# EAGLE board v1.1 (EAGLE 6.4)
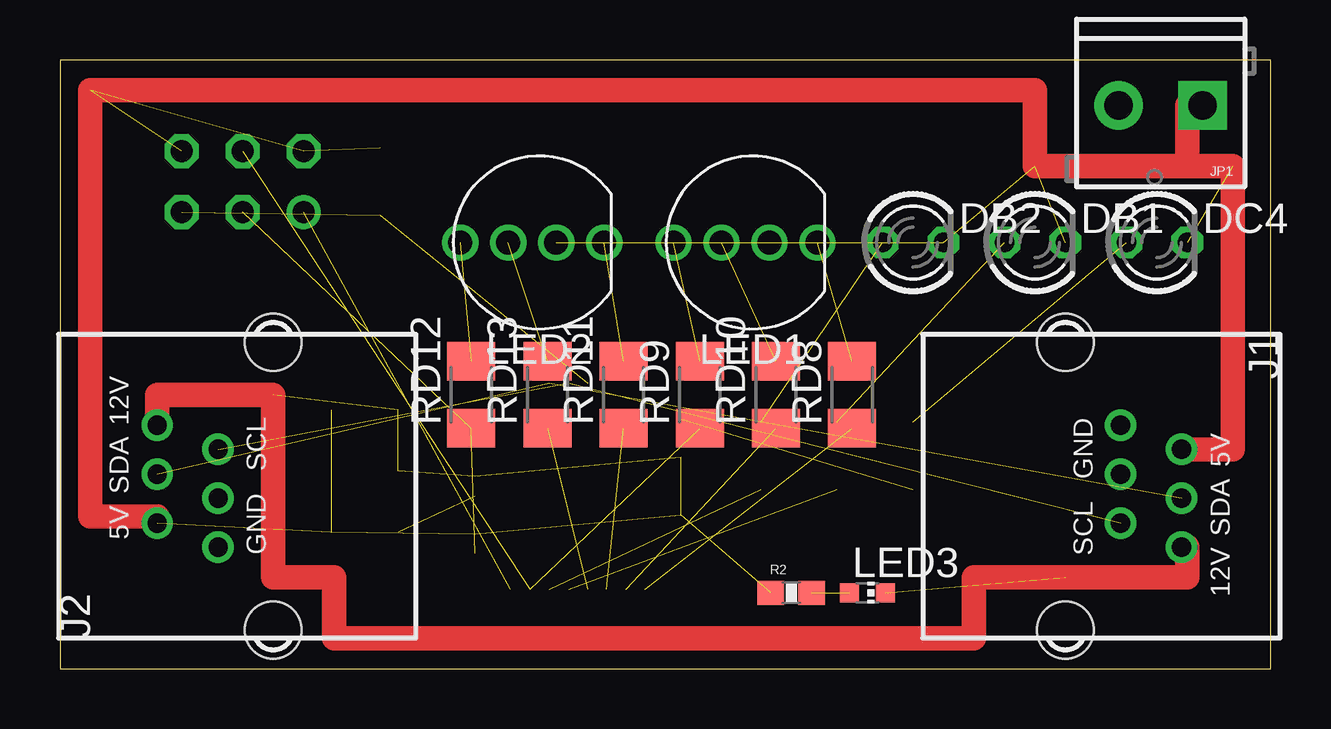
[diagram p0: board, top side]
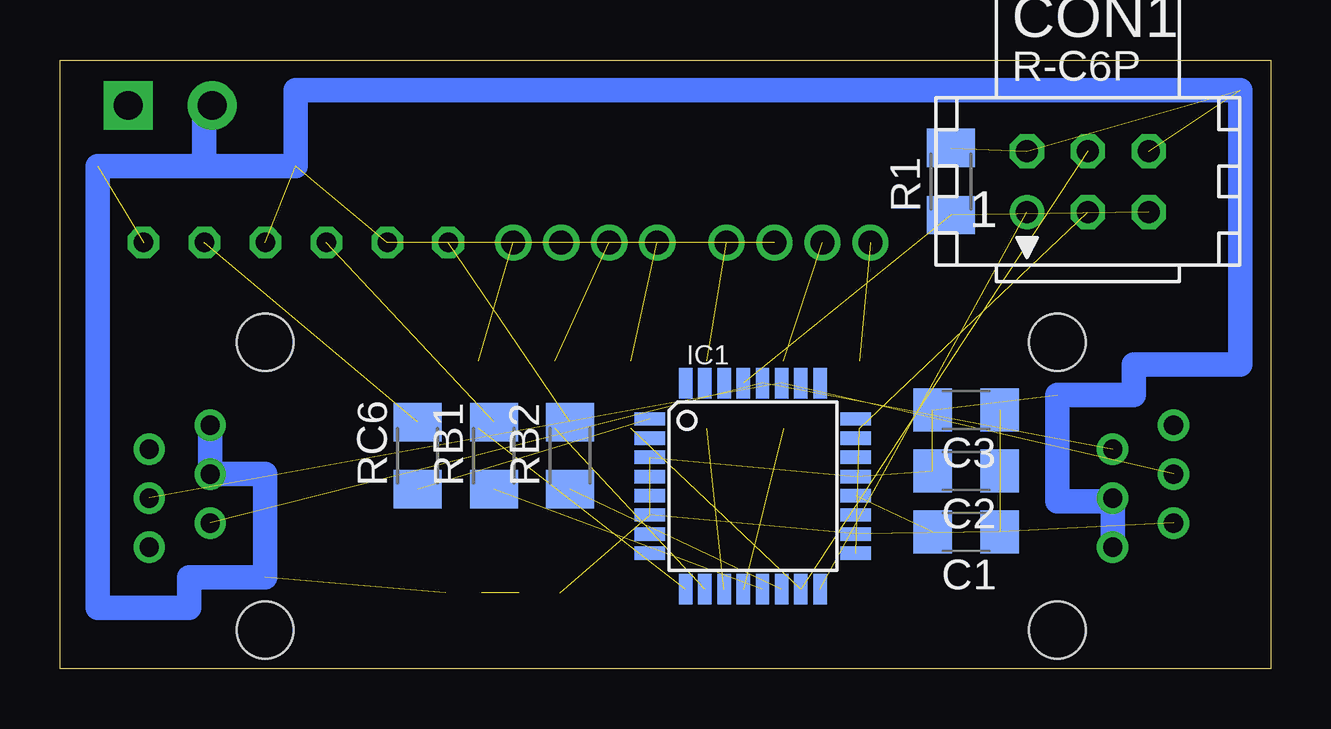
[diagram p1: board, bottom side, seen from below]

Size 50.47 x 25.39 mm. Coordinates in mm from the lower left corner, seen from the top.
Outline: 0,0 50.47,0 50.47,25.39 0,25.39 0,0
Copper layers (1*16): Top 0.035mm / dielectric 1.5mm / Bottom 0.035mm
Design rules "default": minimum track width 10mil, minimum drill 24mil, track to track 8mil, track to pad 8mil, pad to pad 8mil, via to via 8mil, smd to smd 8mil, copper to edge 8mil, drill to drill 8mil, minimum pad ring 10mil, minimum via ring 8mil, stop-mask expansion 4mil, vias tented up to drill 0mil, thermal gap 10mil
Net classes: 1 power: width 0.406 mm
vRestrict: area 15.2,1.3 to 19.1,14; area 24.1,1.3 to 27.9,14; area 15.2,1.3 to 27.9,5.1; area 15.2,10.2 to 27.9,14

## Footprints (pad centres in the part's own frame; a part is rotated, then mirrored left to right if it is on the bottom)
C1206 = smd 1.6 x 1.8: 1 -1.4,0; 2 1.4,0
TINYISP = drill 0.914 octagon: GND 2.54,1.27; MOSI 0,1.27; RESET 2.54,-1.27; SCK 0,-1.27; VCC -2.54,1.27 | drill 0.914: MISO -2.54,-1.27
LED3MM = drill 0.813 octagon: A -1.27,0; K 1.27,0
TQFP32-08 = smd 1.27 x 0.559: 1 -4.293,2.8; 2 -4.293,2; 3 -4.293,1.2; 4 -4.293,0.4; 5 -4.293,-0.4; 6 -4.293,-1.2; 7 -4.293,-2; 8 -4.293,-2.8; 17 4.293,-2.8; 18 4.293,-2; 19 4.293,-1.2; 20 4.293,-0.4; 21 4.293,0.4; 22 4.293,1.2; 23 4.293,2; 24 4.293,2.8 | smd 0.559 x 1.27: 9 -2.8,-4.293; 10 -2,-4.293; 11 -1.2,-4.293; 12 -0.4,-4.293; 13 0.4,-4.293; 14 1.2,-4.293; 15 2,-4.293; 16 2.8,-4.293; 25 2.8,4.293; 26 2,4.293; 27 1.2,4.293; 28 0.4,4.293; 29 -0.4,4.293; 30 -1.2,4.293; 31 -2,4.293; 32 -2.8,4.293
RJ12-RIGHTANGLE-I2C = drill 0.8 pad 1.3: +5V -1.54,4.84; +12V 2.54,4.84; GND1 -2.54,2.3; GND2 -0.5,2.3; SCL 1.54,2.3; SDA 0.5,4.84 | hole 2.36: -6,0; 6,0
SCREWTERMINAL-3.5MM-2 = drill 1.2 pad 2.032 square: 1 0,0 | drill 1.2 pad 2.032: 2 3.5,0
LED-TRICOLOR-THROUGHHOLE = drill 1: BLU 3,0; GND -1,0; GRN 1,0; RED -3,0
CHIP-LED0603 = smd 0.8 x 0.8: A 0,-0.75; C 0,0.75
M1206 = smd 1.6 x 2: 1 -1.4,0; 2 1.4,0
0603-RES = smd 1.1 x 1: 1 -0.85,0; 2 0.85,0

## Placement (x,y rotation side)
C1  0.1uF  [C1206]  12.7,5.71 180 bottom
C2  0.1uF  [C1206]  12.7,8.26 180 bottom
C3  10uF  [C1206]  12.7,10.79 180 bottom
CON1  [TINYISP]  7.62,20.32 0 bottom
DB1  [LED3MM]  40.64,17.78 0 top
DB2  [LED3MM]  35.56,17.78 0 top
DC4  [LED3MM]  45.72,17.78 0 top
IC1  MEGA8-AI  [TQFP32-08]  21.59,7.62 0 bottom
J1  RJ12RIGHTANGLE-I2C  [RJ12-RIGHTANGLE-I2C]  41.91,7.62 270 top
J2  RJ12RIGHTANGLE-I2C  [RJ12-RIGHTANGLE-I2C]  8.89,7.62 90 top
JP1  [SCREWTERMINAL-3.5MM-2]  47.62,23.5 180 top
LED1  RGB-COMMON-CATHODE  [LED-TRICOLOR-THROUGHHOLE]  28.57,17.78 180 top
LED2  RGB-COMMON-CATHODE  [LED-TRICOLOR-THROUGHHOLE]  19.68,17.78 180 top
LED3  [CHIP-LED0603]  33.66,3.17 270 top
R1  10k  [M1206]  13.34,20.32 90 bottom
R2  10k  [0603-RES]  30.48,3.17 0 top
RB1  1k  [M1206]  32.38,8.89 90 bottom
RB2  1k  [M1206]  29.21,8.89 90 bottom
RC6  1k  [M1206]  35.56,8.89 90 bottom
RD8  1k  [M1206]  33.02,11.43 90 top
RD9  1k  [M1206]  26.67,11.43 90 top
RD10  1k  [M1206]  29.84,11.43 90 top
RD11  1k  [M1206]  23.5,11.43 90 top
RD12  1k  [M1206]  17.14,11.43 90 top
RD13  1k  [M1206]  20.32,11.43 90 top

## Library data of the parts
C1-C3 R1 RB1 RB2 RC6 RD8-RD13 = resistor
CON1 = lpatiny; OC_FARNELL: unknown; OC_NEWARK: unknown
DB1 DB2 DC4 = led
IC1 = atmel; MPN: ATMEGA8-16AU; OC_FARNELL: 9171371; OC_NEWARK: 73M8863
J1 J2 LED1 LED2 = lpatiny
JP1 R2 = SparkFun
LED3 = adafruit

## Nets
+5V [power]: C1.1 C2.1 C3.1 CON1.VCC IC1.4 IC1.6 IC1.18 J1.+5V J2.+5V JP1.1 R1.2 R2.1
B0: IC1.12 RD13.1
D5: IC1.9 RD8.1
D6: IC1.10 RD10.1
D7: IC1.11 RD11.1
GND [power]: C2.2 C3.2 CON1.GND DB1.K DB2.K DC4.K IC1.3 IC1.5 IC1.21 J1.GND1 J1.GND2 J2.GND1 J2.GND2 JP1.2 LED1.GND LED2.GND LED3.C
MISO: CON1.MISO IC1.16
MOSI: CON1.MOSI IC1.15 RD9.1
N$1: LED1.RED RD8.2
N$2: IC1.24
N$3: IC1.23
N$4: C1.2 IC1.20
N$5: IC1.26
N$6: IC1.25
N$7: LED1.BLU RD9.2
N$8: LED1.GRN RD10.2
N$9: IC1.30
N$10: IC1.31
N$11: IC1.1 RC6.1
N$12: IC1.32
N$13: J1.+12V J2.+12V
N$14: IC1.2
N$15: LED3.A R2.2
N$18: IC1.13 RB1.1
N$19: IC1.14 RB2.1
N$20: LED2.RED RD11.2
N$21: LED2.BLU RD12.2
N$22: LED2.GRN RD13.2
N$23: DC4.A RC6.2
N$40: DB1.A RB1.2
N$41: DB2.A RB2.2
RESET: CON1.RESET IC1.29 R1.1
SCK: CON1.SCK IC1.17 RD12.1
SCL: IC1.28 J1.SCL J2.SCL
SDA: IC1.27 J1.SDA J2.SDA

## Tracks (layer width: path | path; a pad name or v marks a point on that pad's centre or on a via)
+5V  (9 unrouted)
  Top 1.016: J1.+5V 48.9,9.16 48.9,20.95 46.99,20.95 | 46.99,20.95 40.64,20.95 40.64,24.13 1.27,24.13 1.27,6.35 4.05,6.35 J2.+5V | JP1.1 46.99,23.5 46.99,20.95
B0  (1 unrouted)
D5  (1 unrouted)
D6  (1 unrouted)
D7  (1 unrouted)
GND  (12 unrouted)
  Bottom 1.016: 44.45,20.95 48.9,20.95 48.9,2.54 45.09,2.54 45.09,3.81 41.91,3.81 41.91,8.12 J1.GND2 J1.GND1 | 44.45,20.95 40.64,20.95 40.64,24.13 1.27,24.13 1.27,12.7 5.71,12.7 5.71,11.43 8.89,11.43 8.89,6.99 6.59,6.99 | 6.59,6.99 J2.GND2 | JP1.2 44.45,23.5 44.45,20.95 | 6.59,6.99 J2.GND1
MISO  (1 unrouted)
MOSI  (2 unrouted)
N$1  (1 unrouted)
N$4  (1 unrouted)
N$7  (1 unrouted)
N$8  (1 unrouted)
N$11  (1 unrouted)
N$13
  Top 1.016: J1.+12V 46.99,5.08 46.99,3.81 38.1,3.81 38.1,1.27 11.43,1.27 11.43,3.81 8.89,3.81 8.89,11.43 4.05,11.43 J2.+12V
N$15  (1 unrouted)
N$18  (1 unrouted)
N$19  (1 unrouted)
N$20  (1 unrouted)
N$21  (1 unrouted)
N$22  (1 unrouted)
N$23  (1 unrouted)
N$40  (1 unrouted)
N$41  (1 unrouted)
RESET  (2 unrouted)
SCK  (2 unrouted)
SCL  (2 unrouted)
SDA  (2 unrouted)